# Altium PCB First_add_protect.PcbDoc
Units mm, origin at the board's own origin, x right, y up, seen from the top; angles counter-clockwise.
Board outline 167.01 x 80.01 mm, 4 copper layers (Top Layer, Layer 1, Layer 2, Bottom Layer), stack 0.672 mm thick; 43 components, 29 nets, 176 pads, 436 vias.
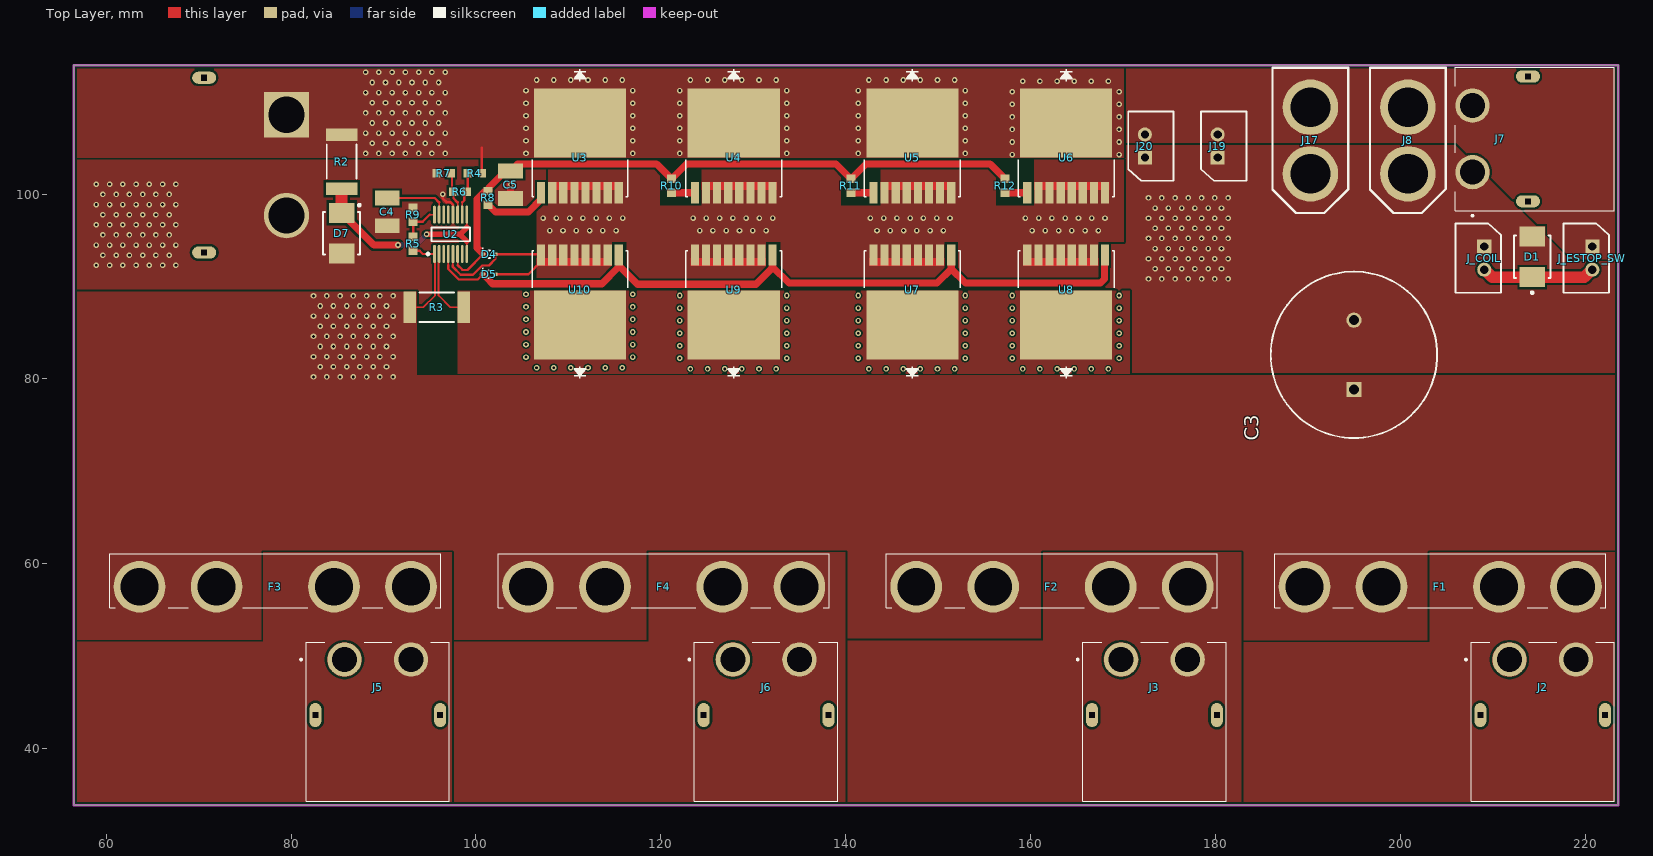
[diagram p0: Top Layer view]
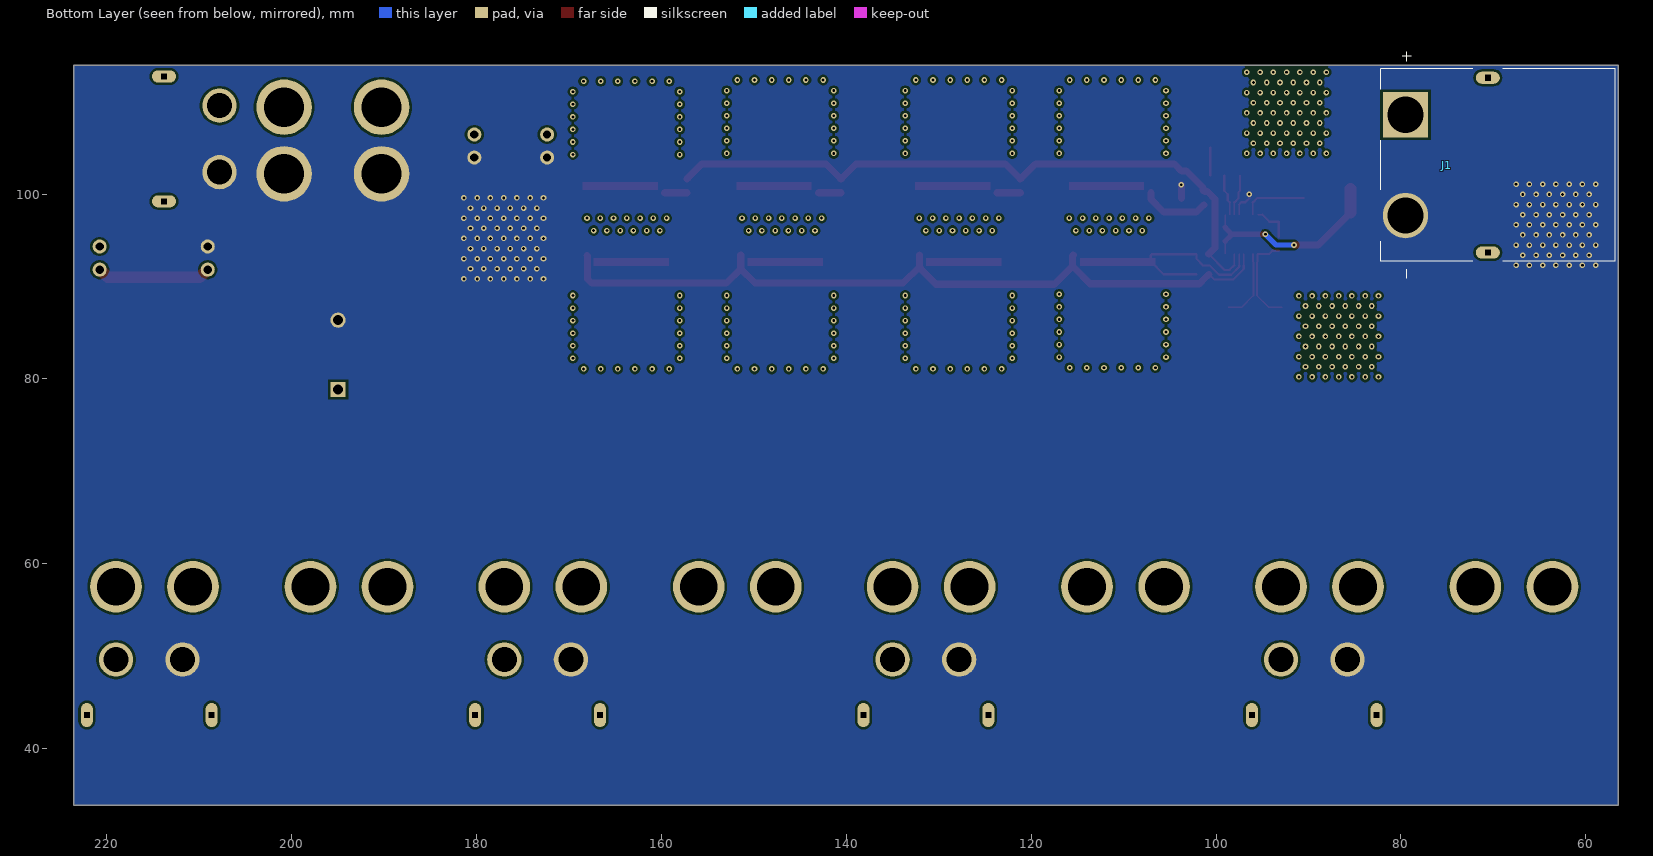
[diagram p1: Bottom Layer view, seen from below]
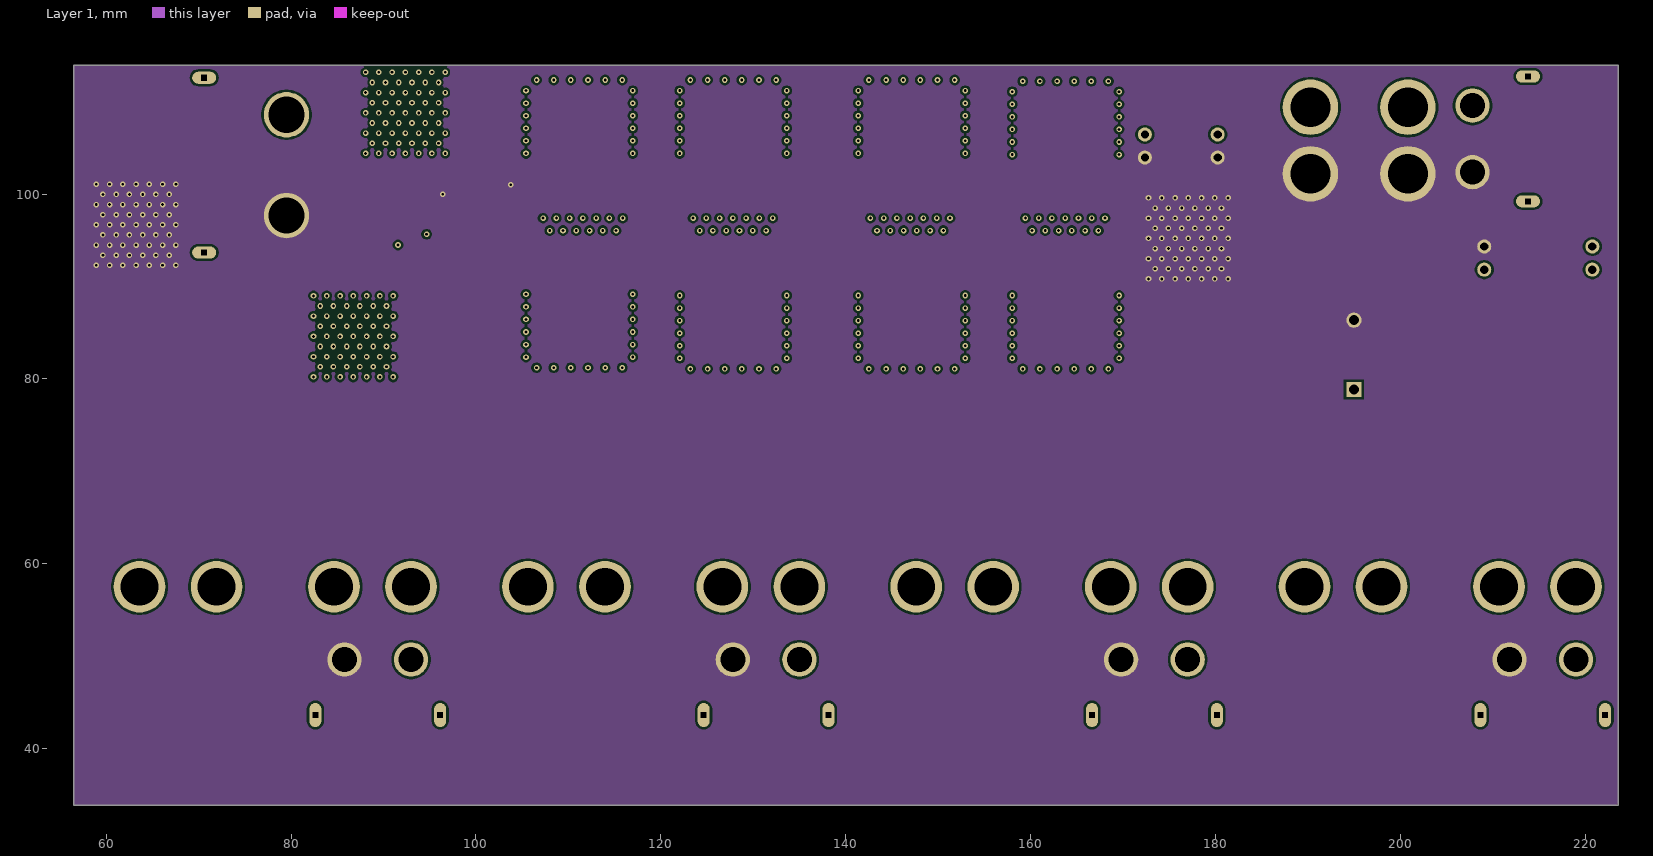
[diagram p2: Layer 1]
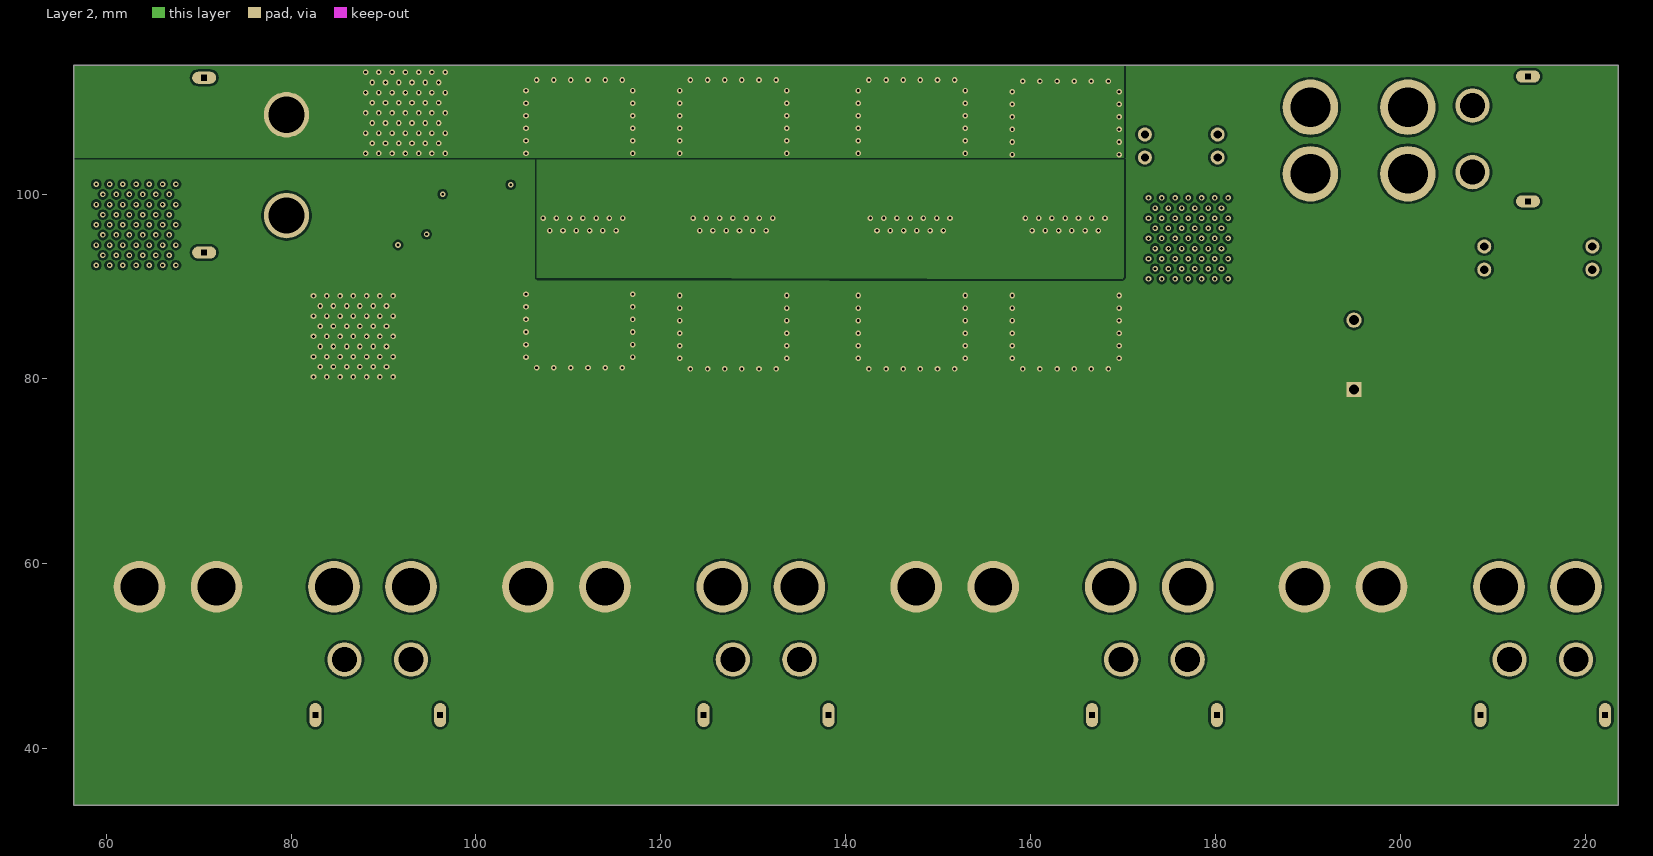
[diagram p3: Layer 2]

## Layer stack, top to bottom
Top Solder: solder mask 0.0102, Solder Resist, Dk 3.5
Top Layer: signal copper 0.07
Dielectric 2: prepreg 0.0711, PP-006, Dk 4.1
Layer 1: signal copper 0.035
Dielectric 1: dielectric 0.32, FR-4, Dk 4.8
Layer 2: signal copper 0.035
Dielectric 3: prepreg 0.0711, PP-006, Dk 4.1
Bottom Layer: signal copper 0.07
Bottom Solder: solder mask 0.0102, Solder Resist, Dk 3.5

## Board outline
56.515,33.909 56.515,113.919 223.52,113.919 223.52,33.919 223.52,33.909

## Design rules (kind name [scope] priority, off if disabled: settings)
Clearance Clearance_1 [InNet('I_SENSE_N') vs InNet('I_SENSE_P')] p1: gap=0.152 ignorepadtopadclearanceinfootprint=TRUE
Clearance [All] p2: gap=0.254 ignorepadtopadclearanceinfootprint=TRUE
DiffPairsRouting [All] p1: maxlimit=0.254 minlimit=0.152 mostfreqgap=0.178 toplayer_minwidth=0.203 toplayer_maxwidth=0.381 toplayer_prefwidth=0.254 midlayer1_minwidth=0.203 midlayer1_maxwidth=0.381 midlayer1_prefwidth=0.254 midlayer2_minwidth=0.203 midlayer2_maxwidth=0.381 midlayer2_prefwidth=0.254 bottomlayer_minwidth=0.203 bottomlayer_maxwidth=0.381 bottomlayer_prefwidth=0.254 maxuncoupledlength=12.7
Height [All] p1: minheight=0 maxheight=50.8 prefheight=12.7
HoleSize [All] p1: absolutevalues=TRUE maxlimit=12.7 minlimit=0.025 maxpercent=80.000 minpercent=20.000
PlaneConnect [All] p1: planeconnectstyle=Direct reliefexpansion=0.508 reliefentries=4 reliefconductorwidth=0.254 reliefairgap=0.254
PolygonConnect [All] p1: connectstyle=Direct reliefconductorwidth=0.254 reliefentries=4 polygonreliefangle="90 Angle" airgapwidth=0.254
RoutingVias [All] p1: holewidth=0.711 width=1.27 viastyle="Through Hole" minholewidth=0.711 minwidth=1.27 maxholewidth=0.711 maxwidth=1.27
SolderMaskExpansion [All] p1: expansion=0.102 istentingtop=FALSE
SupplyNets "Schematic Supply Nets" [InNet('GND')] p1: voltage=0.000
Width Width_1 [(InNet('5V') OR InNet('COIL_EN') OR InNet('GND') OR InNet('NetR3_1') OR InNet('I_SENSE_N') OR InNet('I_SENSE_P')or InNet('VCC'))] p1: maxlimit=2.032 minlimit=0.152 preferedwidth=1.27 midlayer1_minwidth=0.254 midlayer1_maxwidth=0.254 midlayer1_prefwidth=0.254 midlayer2_minwidth=0.254 midlayer2_maxwidth=0.254 midlayer2_prefwidth=0.254 bottomlayer_minwidth=0.254 minimp=50.000000 maximp=50.000000 favimp=50.000000
Width [All] p2: maxlimit=0.762 minlimit=0.152 preferedwidth=0.254 midlayer1_minwidth=0.254 midlayer1_maxwidth=0.254 midlayer2_minwidth=0.254 midlayer2_maxwidth=0.254 bottomlayer_minwidth=0.254 bottomlayer_maxwidth=0.254 minimp=50.000000 maximp=50.000000 favimp=50.000000
26 further rules are at their usual default settings.

## Classes and differential pairs
component class Sheet2: D1 F1 F2 F3 F4 J1 J2 J3 J5 J6 J7 J8 J17 J19 J20 J_COIL J_ESTOP_SW
component class "protect circuit": C3 C4 C5 D4 D5 D7 R2 R3 R4 R5 R6 R7 R8 R9 R10 R11 R12 U2 U3 U4 U5 U6 U7 U8 U9 U10
differential pair I_SENSE: +I_SENSE_P -I_SENSE_N

## Components (designator, comment, footprint, x,y, rotation, side; value= is the part's Value field where it differs from the comment)
C3 "B41858C9477M000" CAPPRD750W90D1800H3700 194.945,78.86 r90 top
C4 "non-polar_Capacitor" 1210 90.406,98.08 r90 top
C5 "non-polar_Capacitor" 1210 103.759,101.001 r90 top
D1 "cc" FP-403A-03-MFG 214.249,93.218 r90 top
D4 "MM5Z15VT1G" ONSC-SOD-523-2-502-01_V 101.448,93.498 r0 top
D5 "MM5Z15VT1G" ONSC-SOD-523-2-502-01_V 101.448,91.313 r0 top
D7 "1SMB5945BT3G" ONSC-SMB-2-403A-03_H_V 85.471,95.758 r270 top
F1 "3555-2" FUSE_3555-2 204.281,57.531 r180 top
F2 "3555-2" FUSE_3555-2 162.286,57.531 r180 top
F3 "3555-2" FUSE_3555-2 78.297,57.531 r180 top
F4 "3555-2" FUSE_3555-2 120.292,57.531 r180 top
J1 "XT90PW-F" AMASS_XT90PW-F 70.612,103.124 r90 bottom
J2 "XT60PW-F" XT60PW-F 215.366,49.657 r0 top
J3 "XT60PW-F" XT60PW-F 173.371,49.657 r0 top
J5 "XT60PW-F" XT60PW-F 89.382,49.657 r0 top
J6 "XT60PW-F" XT60PW-F 131.377,49.657 r0 top
J7 "XT60PW-F" XT60PW-F 207.772,105.962 r90 top
J8 "XT60" XT60_F 200.787,105.791 r90 top
J17 "XT60" XT60_F 190.246,105.791 r90 top
J19 "Molex_2Pin" MOLEX_2PIN 180.213,106.44 r90 top
J20 "Molex_2Pin" MOLEX_2PIN 172.339,106.44 r90 top
J_COIL "Molex_2Pin" MOLEX_2PIN 209.042,91.821 r270 top
J_ESTOP_SW "Molex_2Pin" MOLEX_2PIN 220.726,91.821 r270 top
R2 "2.2kΩ" SMD_2512 85.471,103.505 r270 top
R3 "0.5mΩ" SMD_2512 95.758,87.757 r180 top
R4 "464kΩ" SMD_0603 99.864,102.255 r180 top
R5 "442kΩ" SMD_0603 93.2,94.627 r90 top
R6 "6.65kΩ" SMD_0603 98.261,100.251 r180 top
R7 "10kΩ" SMD_0603 96.514,102.255 r180 top
R8 "10Ω" SMD_0603 101.314,99.581 r270 top
R9 "10kΩ" SMD_0603 93.2,97.768 r90 top
R10 "10Ω" SMD_0603 121.158,100.889 r270 top
R11 "10Ω" SMD_0603 140.556,100.889 r270 top
R12 "10Ω" SMD_0603 157.226,100.889 r270 top
U2 "LTC4364IMS-2#PBF" LT-MS-16_M 97.264,95.643 r90 top
U3 "IPT015N10N5ATMA1" PG-HSOF-8-1_INF 111.243,105.131 r0 top
U4 "IPT015N10N5ATMA1" PG-HSOF-8-1_INF 127.88,105.131 r0 top
U5 "IPT015N10N5ATMA1" PG-HSOF-8-1_INF 147.193,105.131 r0 top
U6 "IPT015N10N5ATMA1" PG-HSOF-8-1_INF 163.83,105.131 r0 top
U7 "IPT015N10N5ATMA1" PG-HSOF-8-1_INF 147.193,88.417 r180 top
U8 "IPT015N10N5ATMA1" PG-HSOF-8-1_INF 163.83,88.417 r180 top
U9 "IPT015N10N5ATMA1" PG-HSOF-8-1_INF 127.88,88.417 r180 top
U10 "IPT015N10N5ATMA1" PG-HSOF-8-1_INF 111.243,88.417 r180 top

## Footprints (in the part's own frame and the unit in brackets; to place one, negate y for a bottom-side part, rotate by r counter-clockwise, add the part's x,y. Pads: shape width x height; smd on the part's side, far side on the other; paste and mask are expansions set on the pad)
1210 [mm]
  rect 1.6x2.7 smd: 1(-1.5,0) 2(1.5,0)
  body extent -1.75,-1.4 1.75,1.4, height 2.8
AMASS_XT90PW-F [mm]
  round 4.916 hole 3.9: N(-5.45,8.9)
  rect 4.916x4.916 / inner round 4.916 / far side rect 4.916x4.916 hole 3.9: P(5.45,8.9)
  oval 1.3x2.6 hole 0.6 square: S1(9.45,0) S2(-9.45,0)
  silkscreen extent -12.25,-13.8 12.25,11.6, body extent -10.65,-13.8 10.65,11.6, height 10.3
CAPPRD750W90D1800H3700 [mm]
  rect 1.65x1.65 hole 1.1: 1(0,0)
  round 1.65 hole 1.1: 2(7.5,0)
  silkscreen extent -5.25,-9 12.75,9, body extent -4.35,-8.1 11.85,8.1, height 35.86
FP-403A-03-MFG [mm]
  rect 2.159x2.743 smd paste+0 mask+0: 1(-2.21,0) 2(2.21,0)
  silkscreen extent -4,-1.97 2.3,1.97, body extent -3.39,-2.07 3.39,2.07, height 0.25
FUSE_3555-2 [mm]
  round 5.59 hole 4.09: 1_1(-14.685,0) 1_2(-6.355,0) 2_1(6.345,0) 2_2(14.675,0)
  silkscreen extent -17.91,-3.59 17.91,2.25, body extent -17.91,-11.51 17.91,-5.67, height 12.97
LT-MS-16_M [mm] "SOP, 16-Leads, Body 4.1x3.1mm, Pitch 0.5mm, IPC Low Density"
  oval 1.95x0.3 smd: 1(-2.125,1.75) 2(-2.125,1.25) 3(-2.125,0.75) 4(-2.125,0.25) 5(-2.125,-0.25) 6(-2.125,-0.75) 7(-2.125,-1.25) 8(-2.125,-1.75) 9(2.125,-1.75) 10(2.125,-1.25) 11(2.125,-0.75) 12(2.125,-0.25) 13(2.125,0.25) 14(2.125,0.75) 15(2.125,1.25) 16(2.125,1.75)
  silkscreen extent -2.25,-2.08 0.75,2.57, body extent -1.55,-2.05 1.55,2.05, height 1.1
MOLEX_2PIN [mil]
  rect 60x60 / inner round 60 / far side round 60 hole 35: 1(-98.43,0)
  round 60 hole 35: 2(0,0)
  silkscreen extent -197,-122 98,71, body extent -196,-123 95,70, height 233
ONSC-SMB-2-403A-03_H_V [mm] "Molded, 2-Leads, Body 4.6x3.95mm"
  rect 2.159x2.743 smd: 1(-2.21,0) 2(2.21,0)
  silkscreen extent -3.16,-2 2.3,2.05, body extent -2.3,-1.97 2.3,1.97, height 2.42
ONSC-SOD-523-2-502-01_V [mm] "SOD, 2-Leads, Body 1.2x0.8mm"
  rect 0.48x0.4 smd: 1(-0.66,0) 2(0.66,0)
  silkscreen extent -0.75,-0.4 0.07,0.65, body extent -0.6,-0.4 0.6,0.4, height 0.7
PG-HSOF-8-1_INF [mil]
  rect 35x91 smd paste+0 mask+0: 1(-165.35,-196.5) 2(-118.11,-196.5) 3(-70.87,-196.5) 4(-23.62,-196.5) 5(23.62,-196.5) 6(70.87,-196.5) 7(118.11,-196.5) 8(165.35,-196.5)
  rect 392x294 smd paste+0 mask+0: 9(0,101)
  Top Layer region: -135.61,-183 -135.61,-151 182.85,-151 182.85,-183
  silkscreen extent -204,-214 204,328
SMD_0603 [mm] "SMD 0603 SIZE"
  rect 0.9x0.95 smd: 1(-0.75,0) 2(0.75,0)
  body extent -0.85,-0.48 0.85,0.48, height 0.55
SMD_2512 [mm] "SMD 2512 SIZE"
  rect 1.35x3.4 smd: 1(-2.925,0) 2(2.925,0)
  silkscreen extent -1.85,-1.6 1.85,1.6, body extent -3.25,-1.7 3.25,1.7, height 0.7
XT60_F [mm]
  round 6 hole 4.3: 1(-3.6,0) 2(3.6,0)
  silkscreen extent -7.85,-4.1 7.85,4.1, body extent -7.8,-4 7.8,4, height 16.8
XT60PW-F [mm]
  round 3.716 hole 2.7: 1(-3.6,0) 2(3.6,0)
  oval 1.3x2.6 hole 0.6 square: S1(-6.75,-6) S2(6.75,-6)
  silkscreen extent -8.4,-15.35 7.75,1.85, body extent -7.75,-15.35 7.75,1.85, height 8.4

## Part data
C3: "Capacitor Polarised", Manufacturer_Name=TDK, Mouser Part Number=871-B41858C9477M, Datasheet Link=https://product.tdk.com/system/files/dam/doc/product/capacitor/aluminum-electrolytic/single-ended/data_sheet/20/30/db/aec/b41858.pdf, Height=37mm, Manufacturer_Part_Number=B41858C9477M000, Mouser Price/Stock=https://www.mouser.co.uk/ProductDetail/EPCOS-TDK/B41858C9477M000?qs=nadT%2FcWsIvCTpIhXZMST%2FQ%3D%3D
C4: library part CMP-024-000020-15, "SMD type ceramic capacitor", Capacitance=0.47µF, Voltage=50V, Design Item ID=Capacitor, Source=robit_passive.SchLib
C5: library part CMP-024-000020-15, "SMD type ceramic capacitor", Capacitance=0.1µF, Voltage=50V, Design Item ID=Capacitor, Source=robit_passive.SchLib
D1: library part CMP-026-000004-1, "Rectifier Diode, Schottky, 1 Phase, 1 Element, 5A, 100V V(RRM), Silicon"
D4 D5: library part CMP-1060-00793-1, "Zener Voltage Regulator, 500 mW, 2-Pin SOD-523, Pb-Free, Tape and Reel", Manufacturer="On Semiconductor", ComponentLink1Description="Manufacturer URL", ComponentLink1URL=http://www.onsemi.com/, ComponentLink2Description=Datasheet, ComponentLink2URL=http://www.onsemi.cn/pub_link/Collateral/MM5Z2V4T1-D.PDF, ComponentLink3Description="Package Specification", ComponentLink3URL=http://www.onsemi.com/pub_link/Collateral/502-01.PDF, DatasheetVersion="Rev. 10", Mounting Technology="Surface Mount", P Max (W)=0.5, PackageDescription="2-Pin SOD, Body 1.2 x 0.8 mm", PackageReference=SOD-523-2-502-01, PackageVersion="Rev. E, 09/2010", Packing="Tape and Reel", PartNumber=MM5Z15VT1G, RoHS=Pb-Free, VZ Typ (V)=15
D7: library part CMP-1060-00175-1, "3 W Zener Voltage Regulator, 2-Pin SMB, Pb-Free, Tape and Reel", Manufacturer="On Semiconductor", ComponentLink1Description="Manufacturer URL", ComponentLink1URL=http://www.onsemi.com/, ComponentLink2Description=Datasheet, ComponentLink2URL=http://www.onsemi.com/pub_link/Collateral/1SMB5913BT3-D.PDF, ComponentLink3Description="Package Specification", ComponentLink3URL=http://www.onsemi.com/pub_link/Collateral/1SMB5913BT3-D.PDF, DatasheetVersion="Rev. 8", Mounting Technology="Surface Mount", PackageDescription="2-Pin Small Molded Package, J-Bend Lead, Body 4.33 x 3.625 mm", PackageReference=SMB-2-403A-03_H, PackageVersion="Rev. H, 05/2011", Packing="Tape and Reel", PartNumber=1SMB5945BT3G, RoHS=Pb-Free, VZ Typ (V)=68
F1 F2 F3 F4: "Auto Fuse Holder, 1 Fuse, Blade, Standard, THM, 50Amp, Hi-Temp Nylon, UL94V-0", Package=None, Check_prices=https://www.snapeda.com/parts/3555-2/Keystone/view-part/?ref=eda, MF="Keystone Electronics", MP=3555-2, SnapEDA_Link=https://www.snapeda.com/parts/3555-2/Keystone/view-part/?ref=snap
J1: library part CMP-019-000093-4, "Socket, DC supply, XT90, female, PIN:2, on PCBs, THT", Package=Package, Check_prices=https://www.snapeda.com/parts/XT90PW-F/AMASS/view-part/?ref=eda, Component Type=Standard, Design Item ID=XT90PW-F, MF=AMASS, MP=XT90PW-F, Pin Count=2, SnapEDA_Link=https://www.snapeda.com/parts/XT90PW-F/AMASS/view-part/?ref=snap, Source=XT90PW-F.SchLib, System=Connector
J2 J3 J5 J6 J7: library part CMP-019-000058-2, "Socket DC Supply Connector Female", Package=Package, Availability="Not in stock", Check_prices=https://www.snapeda.com/parts/XT60PW-F/AMASS/view-part/?ref=eda, Design Item ID=XT60PW-F, MF=AMASS, MP=XT60PW-F, Price=None, SnapEDA_Link=https://www.snapeda.com/parts/XT60PW-F/AMASS/view-part/?ref=snap, Source=robit_connector.SchLib, System=Connector
J8 J17: library part CMP-019-000061-2, "XT60 connector", System=Connector
J19 J20 J_COIL J_ESTOP_SW: library part CMP-019-000043-2, "Molex 2Pin Connector", Design Item ID=Molex_2Pin, Source=robit_connector.SchLib, System=Connector
R2 R3 R4 R5 R6 R7 R8 R9 R10 R11 R12: library part Resistor
U2: library part CMP-0474-00539-1, "Surge Stopper with Ideal Diode, 4 to 80 V Vin, 16-pin SOP (MS-16), -40 to 85 degC, Pb-Free", Extended Temp="C, I, H", Manufacturer="Linear Technology", Power Good=no, Active Limiting=yes, Circuit Breaker Accuracy(%)=10, Circuit Breaker Threshold="50 mV", Circuit Breakers(#)=1, ComponentLink1Description="Manufacturer URL", ComponentLink1URL=http://www.linear.com/, ComponentLink2Description=Datasheet, ComponentLink2URL=http://cds.linear.com/docs/en/datasheet/436412f.pdf, ComponentLink3Description="Package Specification", ComponentLink3URL=http://cds.linear.com/docs/en/packaging/05081669_A_MS16.pdf, Fast Comparator=no, Mounting Technology="Surface Mount", PackageDescription="16-Pin Plastic MSOP, Body 4.04 x 3.00 mm, Pitch 0.50 mm", PackageReference=MS16, PackageVersion="Rev. Ã˜, 06/2010", PartNumber=LTC4364IMS-2#PBF, RoHS=TRUE, Vin Range="4 to 80 V"
U3 U4 U5 U6 U7 U8 U9 U10: "Infineonâ€™s OptiMOSâ„¢ power MOSFET in TO-Leadless package is optimized for high current applications up to 300 A, such as forklifts, light electric vehicles (LEV), power tools, point-of-loads (POL), telecom and e-fuses. Furthermore, the 60 percent smaller package size enables a very compact design. Compared to DÂ²PAK 7-pin, TO-Leadless shows a substantial reduction in footprint of 30 percent. The 50 percent reduced height offers a significant advantage in narrow applications such as rack or blade servers.", Manufacturer_Name=Infineon, Copyright="Copyright (C) 2025 Ultra Librarian. All rights reserved.", Manufacturer_Part_Number=IPT015N10N5ATMA1, RefDes=RefDes, Type=Type

## Via types
v1: diameter 0.6, hole 0.3, Top Layer to Bottom Layer, 436 vias

## Nets (pads, with @x,y where several pads share a name; then routed paths per layer and width w, separated by ;. In a path a pad name is that pad's centre, name@x,y a point inside that pad or via, vN(x,y) a via of type N, cw(c..) or ccw(c..) an arc to the next point about the centre after c; other vN are vias at no path point)
5V: 
12v_IN: J7.2 J8.2 J17.2 J19.2 J20.2 J_ESTOP_SW.1
ARM_L: F3.1_1 F3.1_2 J5.2
ARM_R: F1.1_1 F1.1_2 J2.2
CAN_H: 
CAN_L: 
COIL_EN: D1.1 J_COIL.2 J_ESTOP_SW.2 | length 12.4
  Top Layer w1.27: J_COIL.2 209.1,91.821 209.913,91.008 219.844,91.008 220.657,91.821 J_ESTOP_SW.2
DGATE: D5.1 U2.4 U7.1 U8.1 U9.1 U10.1 | length 84.7
  Top Layer w0.152: 96.998,92.293 96.998,93.502 U2.4
  Top Layer w0.254: 96.998,92.293 96.998,91.907 98.143,90.763 100.198,90.763 100.675,91.24 100.715,91.24 D5.1
  Top Layer w0.762: D5.1 101.233,90.868 101.233,90.85 101.786,90.297 113.63,90.297 115.379,92.047 ; U10.1 115.506,93.345 115.506,92.189 117.455,90.241 130.287,90.241 131.959,91.914 131.959,91.991 132.085,92.117 ; U9.1@132.085,93.404 132.085,92.117 ; U7.1@151.398,93.404 151.398,91.892 ; U8.1@168.03,93.347 167.971,93.289 167.971,90.814 167.525,90.368 152.922,90.368 151.398,91.892 ; 132.085,92.117 133.834,90.368 149.874,90.368 151.398,91.892
ENABLE: U2.14
FAULT: U2.13
FB: R5.2 R9.1 U2.16 | length 4.3
  Top Layer w0.152: 94.987,97.768 U2.16
  Top Layer w0.254: R5.2 R9.1 94.237,97.018 94.987,97.768
GND: C3.2 C4.1 C5.1 D1.2 D7.2 J1.N J2.1 J3.1 J5.1 J6.1 J7.1 J8.1 J17.1 J19.1 J20.1 J_COIL.1 R7.2 R9.2 U2.12 | length 4.4
  Top Layer w0.152: U2.12 97.494,97.788 97.494,98.824 97.514,98.844
  Top Layer w0.254: v1(96.397,99.976) 96.397,99.549 96.821,99.124 97.234,99.124 97.514,98.844
  Top Layer w0.762: C5.1 v1(103.759,101.001)
  other v1: 172.731,90.818 174.166,90.818 175.601,90.818 177.037,90.818 178.472,90.818 179.907,90.818 181.342,90.818 173.449,91.913 174.884,91.913 176.319,91.913 177.754,91.913 179.189,91.913 180.624,91.913 58.937,92.288 60.372,92.288 61.807,92.288 63.242,92.288 64.677,92.288 66.112,92.288 67.548,92.288 172.731,93.008 174.166,93.008 175.601,93.008 177.037,93.008 178.472,93.008 179.907,93.008 181.342,93.008 59.654,93.383 61.089,93.383 62.525,93.383 63.96,93.383 65.395,93.383 66.83,93.383 173.449,94.104 174.884,94.104 176.319,94.104 177.754,94.104 179.189,94.104 180.624,94.104 58.937,94.478 60.372,94.478 61.807,94.478 63.242,94.478 64.677,94.478 66.112,94.478 67.548,94.478 172.731,95.199 174.166,95.199 175.601,95.199 177.037,95.199 178.472,95.199 179.907,95.199 181.342,95.199 59.654,95.574 61.089,95.574 62.525,95.574 63.96,95.574 65.395,95.574 66.83,95.574 173.449,96.295 174.884,96.295 176.319,96.295 177.754,96.295 179.189,96.295 180.624,96.295 58.937,96.669 60.372,96.669 61.807,96.669 63.242,96.669 64.677,96.669 66.112,96.669 67.548,96.669 172.731,97.39 174.166,97.39 175.601,97.39 177.037,97.39 178.472,97.39 179.907,97.39 181.342,97.39 59.654,97.764 61.089,97.764 62.525,97.764 63.96,97.764 65.395,97.764 66.83,97.764 173.449,98.485 174.884,98.485 176.319,98.485 177.754,98.485 179.189,98.485 180.624,98.485 58.937,98.86 60.372,98.86 61.807,98.86 63.242,98.86 64.677,98.86 66.112,98.86 67.548,98.86 172.731,99.581 174.166,99.581 175.601,99.581 177.037,99.581 178.472,99.581 179.907,99.581 181.342,99.581 59.654,99.955 61.089,99.955 62.525,99.955 63.96,99.955 65.395,99.955 66.83,99.955 58.937,101.051 60.372,101.051 61.807,101.051 63.242,101.051 64.677,101.051 66.112,101.051 67.548,101.051
HEAD: 
HGATE: C5.2 D4.1 R8.1 R10.1 R11.1 R12.1 U2.6 | length 73.4
  Top Layer w0.152: 98.014,92.328 U2.6 ; 98.514,91.828 98.564,91.779
  Top Layer w0.254: 98.014,92.328 98.514,91.828 ; 98.564,91.779 99.069,91.779 D4.1
  Top Layer w0.762: D4.1 100.096,94.191 100.096,99.436 100.922,100.262 101.22,100.262 101.289,100.331 R8.1 ; R8.1@101.339,100.331 101.408,100.4 101.408,100.7 103.209,102.501 C5.2 104.509,103.251 119.546,103.251 121.064,101.733 121.064,101.709 121.133,101.639 R10.1 ; R10.1@121.183,101.639 121.252,101.709 121.252,101.733 122.77,103.251 138.944,103.251 140.462,101.733 140.462,101.709 R11.1@140.531,101.639 ; R11.1 140.581,101.639 140.65,101.709 140.65,101.733 142.168,103.251 155.614,103.251 157.132,101.733 157.132,101.709 157.201,101.639 R12.1
I_SENSE_N: C3.1 F1.2_1 F1.2_2 F2.2_1 F2.2_2 F3.2_1 F3.2_2 F4.2_1 F4.2_2 R3.2 R5.1 U2.1 | length 10.2
  Top Layer w0.203: R3.2 94.303,87.757 95.573,89.027 95.573,92.607 95.514,92.667 U2.1
  Top Layer w0.254: R5.1 93.216,93.861 93.907,93.861 94.25,93.518 U2.1
  other v1: 82.432,80.223 83.867,80.223 85.302,80.223 86.737,80.223 88.172,80.223 89.607,80.223 91.043,80.223 123.19,81.09 125.044,81.09 126.898,81.09 128.753,81.09 130.607,81.09 132.461,81.09 142.494,81.09 144.348,81.09 146.202,81.09 148.057,81.09 149.911,81.09 151.765,81.09 159.131,81.09 160.985,81.09 162.839,81.09 164.694,81.09 166.548,81.09 168.402,81.09 106.553,81.216 108.407,81.216 110.261,81.216 112.116,81.216 113.97,81.216 115.824,81.216 83.149,81.318 84.584,81.318 86.02,81.318 87.455,81.318 88.89,81.318 90.325,81.318 122.047,82.239 133.604,82.239 141.351,82.239 152.908,82.239 157.988,82.239 169.545,82.239 105.41,82.366 116.967,82.366 82.432,82.413 83.867,82.413 85.302,82.413 86.737,82.413 88.172,82.413 89.607,82.413 91.043,82.413 83.149,83.509 84.584,83.509 86.02,83.509 87.455,83.509 88.89,83.509 90.325,83.509 122.047,83.596 133.604,83.596 141.351,83.596 152.908,83.596 157.988,83.596 169.545,83.596 105.41,83.723 116.967,83.723 82.432,84.604 83.867,84.604 85.302,84.604 86.737,84.604 88.172,84.604 89.607,84.604 91.043,84.604 122.047,84.954 133.604,84.954 141.351,84.954 152.908,84.954 157.988,84.954 169.545,84.954 105.41,85.081 116.967,85.081 83.149,85.699 84.584,85.699 86.02,85.699 87.455,85.699 88.89,85.699 90.325,85.699 122.047,86.312 133.604,86.312 141.351,86.312 152.908,86.312 157.988,86.312 169.545,86.312 105.41,86.439 116.967,86.439 82.432,86.795 83.867,86.795 85.302,86.795 86.737,86.795 88.172,86.795 89.607,86.795 91.043,86.795 122.047,87.669 133.604,87.669 141.351,87.669 152.908,87.669 157.988,87.669 169.545,87.669 105.41,87.796 116.967,87.796 83.149,87.89 84.584,87.89 86.02,87.89 87.455,87.89 88.89,87.89 90.325,87.89 82.432,88.986 83.867,88.986 85.302,88.986 86.737,88.986 88.172,88.986 89.607,88.986 91.043,88.986 122.047,89.027 133.604,89.027 141.351,89.027 152.908,89.027 157.988,89.027 169.545,89.027 105.41,89.154 116.967,89.154
I_SENSE_P: R3.1 U2.2 U7.9 U8.9 U9.9 U10.9 | length 7.8
  Top Layer w0.203: U2.2 96.014,92.667 95.954,92.607 95.954,89.027 97.224,87.757 R3.1
LEG_L: F4.1_1 F4.1_2 J6.2
LEG_R: F2.1_1 F2.1_2 J3.2
NetD2_1: 
NetR8_2: R8.2 U3.1 | length 7.3
  Top Layer w0.762: R8.2 101.339,98.831 102.103,98.066 105.681,98.066 107.043,99.428 U3.1
NetR10_2: R10.2 U4.1 | length 2.5
  Top Layer w0.762: R10.2 U4.1
NetR11_2: R11.2 U5.1 | length 2.4
  Top Layer w0.762: R11.2 U5.1
NetR12_2: R12.2 U6.1 | length 2.4
  Top Layer w0.762: R12.2 U6.1
OV: R6.2 R7.1 U2.11 | length 4.5
  Top Layer w0.152: U2.11 98.014,99.094
  Top Layer w0.254: R7.1@97.411,102.005 97.411,100.351 97.563,100.199 97.563,99.544 98.014,99.094
SOURCE: D4.2 D5.2 U2.5 U3.2 U3.3 U3.4 U3.5 U3.6 U3.7 U3.8 U4.2 U4.3 U4.4 U4.5 U4.6 U4.7 U4.8 U5.2 U5.3 U5.4 U5.5 U5.6 U5.7 U5.8 U6.2 U6.3 U6.4 U6.5 U6.6 U6.7 U6.8 U7.2 U7.3 U7.4 U7.5 U7.6 U7.7 U7.8 U8.2 U8.3 U8.4 U8.5 U8.6 U8.7 U8.8 U9.2 U9.3 U9.4 U9.5 U9.6 U9.7 U9.8 U10.2 U10.3 U10.4 U10.5 U10.6 U10.7 U10.8 | length 18.8
  Top Layer w0.152: 97.506,92.298 97.506,93.51 U2.5
  Top Layer w0.254: 97.506,92.298 97.506,92.118 98.353,91.271 99.668,91.271 100.674,92.276 101.394,92.276 102.108,92.99 D4.2 106.953,93.498 U10.8 107.043,92.697 105.659,91.313 D5.2
  other v1: 107.978,96.043 109.413,96.043 110.848,96.043 112.283,96.043 113.718,96.043 115.153,96.043 124.195,96.043 125.63,96.043 127.065,96.043 128.5,96.043 129.935,96.043 131.37,96.043 143.372,96.043 144.807,96.043 146.242,96.043 147.677,96.043 149.112,96.043 150.547,96.043 160.136,96.043 161.571,96.043 163.006,96.043 164.441,96.043 165.876,96.043 167.311,96.043 107.26,97.392 108.695,97.392 110.13,97.392 111.565,97.392 113.001,97.392 114.436,97.392 115.871,97.392 123.477,97.392 124.912,97.392 126.347,97.392 127.783,97.392 129.218,97.392 130.653,97.392 132.088,97.392 142.654,97.392 144.089,97.392 145.524,97.392 146.96,97.392 148.395,97.392 149.83,97.392 151.265,97.392 159.418,97.392 160.853,97.392 162.288,97.392 163.724,97.392 165.159,97.392 166.594,97.392 168.029,97.392
TMR: C4.2 U2.15 | length 7
  Top Layer w0.152: U2.15 96.014,99.094
  Top Layer w0.254: C4.2@90.533,99.574 95.533,99.574 96.014,99.094
UV: R4.2 R6.1 U2.10 | length 4.5
  Top Layer w0.152: U2.10 98.514,99.088 98.522,99.096
  Top Layer w0.254: 98.522,99.096 98.736,99.31 98.736,99.976 99.111,100.351 R4.2@99.111,102.005
V_IN: J1.P R2.1 R4.1 U3.9 U4.9 U5.9 U6.9 | length 3
  Top Layer w0.254: R4.1@100.611,102.005 100.611,105.031
  other v1: 157.988,104.267 169.545,104.267 88.062,104.394 89.497,104.394 90.932,104.394 92.367,104.394 93.802,104.394 95.237,104.394 96.673,104.394 105.41,104.394 116.967,104.394 122.047,104.394 133.604,104.394 141.351,104.394 152.908,104.394 88.779,105.489 90.214,105.489 91.65,105.489 93.085,105.489 94.52,105.489 95.955,105.489 157.988,105.625 169.545,105.625 105.41,105.752 116.967,105.752 122.047,105.752 133.604,105.752 141.351,105.752 152.908,105.752 88.062,106.585 89.497,106.585 90.932,106.585 92.367,106.585 93.802,106.585 95.237,106.585 96.673,106.585 157.988,106.982 169.545,106.982 105.41,107.109 116.967,107.109 122.047,107.109 133.604,107.109 141.351,107.109 152.908,107.109 88.779,107.68 90.214,107.68 91.65,107.68 93.085,107.68 94.52,107.68 95.955,107.68 157.988,108.34 169.545,108.34 105.41,108.467 116.967,108.467 122.047,108.467 133.604,108.467 141.351,108.467 152.908,108.467 88.062,108.775 89.497,108.775 90.932,108.775 92.367,108.775 93.802,108.775 95.237,108.775 96.673,108.775 157.988,109.698 169.545,109.698 105.41,109.825 116.967,109.825 122.047,109.825 133.604,109.825 141.351,109.825 152.908,109.825 88.779,109.871 90.214,109.871 91.65,109.871 93.085,109.871 94.52,109.871 95.955,109.871 88.062,110.966 89.497,110.966 90.932,110.966 92.367,110.966 93.802,110.966 95.237,110.966 96.673,110.966 157.988,111.055 169.545,111.055 105.41,111.182 116.967,111.182 122.047,111.182 133.604,111.182 141.351,111.182 152.908,111.182 88.779,112.062 90.214,112.062 91.65,112.062 93.085,112.062 94.52,112.062 95.955,112.062 159.131,112.204 160.985,112.204 162.839,112.204 164.694,112.204 166.548,112.204 168.402,112.204 106.553,112.331 108.407,112.331 110.261,112.331 112.116,112.331 113.97,112.331 115.824,112.331 123.19,112.331 125.044,112.331 126.898,112.331 128.753,112.331 130.607,112.331 132.461,112.331 142.494,112.331 144.348,112.331 146.202,112.331 148.057,112.331 149.911,112.331 151.765,112.331 88.062,113.157 89.497,113.157 90.932,113.157 92.367,113.157 93.802,113.157 95.237,113.157 96.673,113.157
VCC: D7.1 R2.2 U2.8 U2.9 | length 22.2
  Top Layer w0.152: 99.011,94.893 99.014,94.89 U2.8 ; 99.014,96.396 U2.9
  Top Layer w0.203: 99.011,96.393 99.014,96.396
  Top Layer w0.584: v1(94.664,95.643) 98.261,95.643 ; 99.011,94.893 98.261,95.643 ; 99.011,96.393 98.261,95.643
  Top Layer w0.762: D7.1 88.951,94.488 v1(91.567,94.488)
  Top Layer w1.27: D7.1 R2.2
  Bottom Layer w0.584: v1(91.567,94.488) 93.509,94.488 94.194,95.173 v1(94.664,95.643)
pads on no net: J1.S1 J1.S2 J2.S1 J2.S2 J3.S1 J3.S2 J5.S1 J5.S2 J6.S1 J6.S2 J7.S1 J7.S2 U2.3 U2.7

## Polygon pours and split planes (outlines as drawn)
GND on Top Layer "GND_L01_P016" (solid, remove dead copper, pour order 16): 56.515,33.909 56.515,113.919 223.52,113.919 223.52,33.919 223.52,33.909
12v_IN on Top Layer "12V_IN_L01_P010" (solid, pour order 10): 205.994,105.537 218.567,92.964 223.52,92.964 223.52,113.771 223.372,113.919 170.053,113.531 170.053,105.537
I_SENSE_N on Top Layer "I_SENSE_N_L01_P005" (solid, pour order 5): 56.409,80.137 56.388,80.158 56.388,89.457 93.599,89.457 93.599,80.391 223.393,80.391 223.393,61.371 203.15,61.371 203.15,51.507 182.78,51.507 182.78,61.217 182.753,61.244 161.353,61.244 161.353,51.688 139.954,51.688 139.954,61.244 118.668,61.244 118.668,51.557 97.382,51.557 97.382,61.244 77.012,61.244 77.012,51.557 56.642,51.557
I_SENSE_P on Top Layer "I_SENSE_P_L01_P006" (solid, remove dead copper, pour order 6): 98.044,80.391 98.044,89.535 170.688,89.535 170.688,80.391
SOURCE on Top Layer "SOURCE_L01_P009" (solid, pour order 9): 106.598,90.805 114.687,90.805 114.687,94.818 116.298,94.818 116.298,90.805 131.324,90.805 131.324,94.818 132.935,94.818 132.935,90.805 150.637,90.805 150.637,94.818 152.17,94.818 152.17,90.805 167.274,90.805 167.274,94.818 170.053,94.818 170.053,103.699 160.386,103.699 160.386,98.73 156.21,98.73 156.21,102.743 143.749,102.743 143.749,98.73 139.446,98.73 139.446,102.743 124.435,102.743 124.435,98.73 119.888,98.73 119.888,102.743 107.798,102.743 107.798,98.731 106.598,98.731
V_IN on Top Layer "V_IN_L01_P007" (solid, remove dead copper, pour order 7): 56.515,103.95 56.515,113.919 170.053,113.919 170.053,103.95
ARM_R on Top Layer "ARM_R_L01_P004" (solid, pour order 4): 203.15,61.244 203.15,51.507 182.78,51.507 182.78,33.909 223.52,33.909 223.52,61.244
LEG_R on Top Layer "LEG_R_L01_P003" (solid, pour order 3): 161.353,61.244 161.353,51.688 139.954,51.688 139.954,33.909 182.753,33.909 182.753,61.244
LEG_L on Top Layer "LEG_L_L01_P002" (solid, pour order 2): 118.668,61.244 118.668,51.557 97.382,51.557 97.382,33.909 139.954,33.909 139.954,61.244
ARM_L on Top Layer "ARM_L_L01_P000" (solid, pour order 0): 77.012,61.244 77.012,51.557 56.642,51.557 56.642,33.909 97.382,33.909 97.382,61.244
GND on Layer 1 "GND_L02_P011" (solid, pour order 11): 56.515,33.909 56.515,113.919 223.52,113.919 223.52,33.919 223.52,33.909
SOURCE on Layer 2 "SOURCE_L03_P014" (solid, pour order 14): 106.598,90.944 106.598,103.841 106.553,103.886 106.617,103.95 170.053,103.95 170.053,90.805
I_SENSE_N on Layer 2 "I_SENSE_N_L03_P015" (solid, pour order 15): 56.515,33.909 56.515,113.919 223.52,113.919 223.52,33.919 223.52,33.909
V_IN on Layer 2 "V_IN_L03_P013" (solid, remove dead copper, pour order 13): 56.515,103.95 56.515,113.919 170.053,113.919 170.053,103.95
GND on Bottom Layer "GND_L04_P018" (solid, pour order 18): 56.515,33.909 56.515,113.919 223.52,113.919 223.52,33.919 223.52,33.909

## Keep-outs
Top Layer:
  lines w0.254: 223.515,113.919 56.515,113.919 56.515,33.909 223.52,33.909 ; 223.52,33.919 223.52,113.919